# Altium PCB arduino_ext_terminal.PcbDoc (part 2 of 2)
Units mm, origin at the board's own origin, x right, y up, seen from the top; angles counter-clockwise.
Board outline 92.5 x 46.8 mm, 2 copper layers (Top Layer, Bottom Layer), stack 1.036 mm thick; 54 components, 39 nets, 236 pads, 58 vias.
Unrouted connection lines stored in the file: 47.
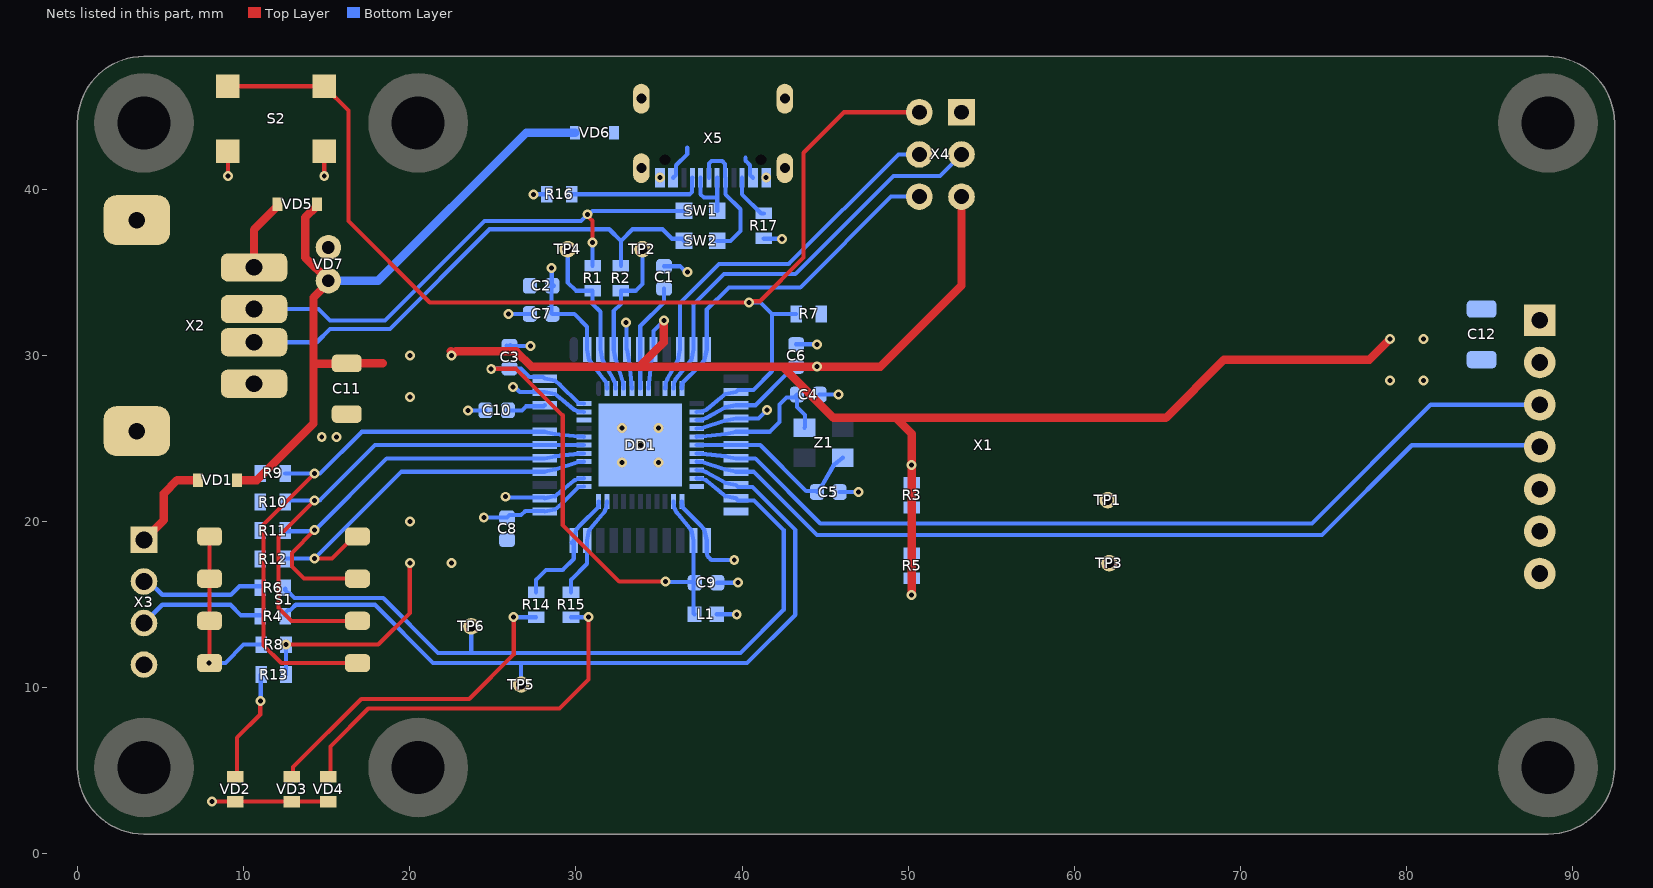
[diagram p2: the nets of this part, all layers, seen from the top]

## Part data
C1: library part CC0603KRX7R9BB105, "Конденсатор кер. 1мкФ 50В", Manufacturer=Yageo, Voltage=50В, Name=CC0603KRX7R9BB105, TKE=X7R
C2: library part CC0603KRX5R8BB475, "Конденсатор кер. 4,7мкФ 25В", Manufacturer=Yageo, Voltage=25В, Name=CC0603KRX5R8BB475, TKE=X7R
C3 C6 C7 C8 C9 C10: library part CC0603JPX7R9BB104, "Конденсатор кер. 0,1мкФ 50В", Manufacturer=Yageo, Voltage=50В, Name=CC0603JPX7R9BB104, TKE=X7R
C4 C5: library part CC0603JRNPO9BN220, "Конденсатор кер. 22пФ 50В", Manufacturer=Yageo, Voltage=50В, Name=CC0603JRNPO9BN220, TKE=NP0
C11 C12: library part GRM3195C1H333J, "Конденсатор кер. 0,033мкФ 50В NP0", Manufacturer=Murata, Voltage=50В, Name=GRM3195C1H333J, TKE=NP0
DD1: library part ATMEGA32U4, "Микроконтроллер AVR 8-bit", HelpURL=https://files.amperka.ru/datasheets/ATMega32u4.pdf, Name=ATmega32u4
L1: "Ферритовая бусина 180Ом 1,5А", Manufacturer=Murata, Name=BLM18PG181SN1D
R1 R2: library part RC0603FR-0722RL, "Резистор 22 Ом 0,1Вт 1%", Manufacturer=YAGEO, Tolerance=1%, Name=RC0603FR-0722RL
R3 R5 R7 R9 R10 R11 R12: library part RC0603FR-0710KL, "Резистор 10кОм 0,063Вт 1%", Manufacturer=YAGEO, Tolerance=1%, Name=RC0603FR-0710KL
R4 R6: library part RC0603FR-07120RL, "Резистор 120Ом 0,063Вт 1%", Manufacturer=YAGEO, Tolerance=1%, Name=RC0603FR-07120RL
R8: library part RC0603FR-071KL, "Резистор 1кОм 0,063Вт 1%", Manufacturer=YAGEO, Tolerance=1%, Name=RC0603FR-071KL
R13 R14 R15: library part RC0603FR-07510RL, "Резистор 510 Ом 0,1Вт 1%", Manufacturer=YAGEO, Tolerance=1%, Name=RC0603FR-07510RL
R16 R17: library part RC0603FR-075K1L, "Резистор 5,1кОм 0,1Вт 1%", Manufacturer=YAGEO, Tolerance=1%, Name=RC0603FR-075K1L
S1: library part A6S-4102-H
S2: "тактовая кнопка SMD", Name=IT-1187
SW1 SW2: library part jumper, "Запаиваемая перемычка"
TP1 TP2 TP3 TP4 TP5 TP6: library part TESTPOINT_HOLE
  TP1: Name=SCL
  TP2: Name=USB_Dp
  TP3: Name=SDA
  TP4: Name=USB_Dn
  TP5: Name=RX
  TP6: Name=TX
VD1 VD5 VD6: "Диод Шоттки 1N5817WS 20V 1А 0.45V", current=1A, drop voltage=0,45В, Voltage=20В, Name=1N5817WS, Производитель="Hottech Co. Ltd"
VD2: library part FYLS-0603BUGC, "Светодтод зеленый SMD Foryard Optoelectronics Co.", Name="Зеленый светодиод"
VD3 VD4: library part FYLS-0603BUBC, "Светодтод синий SMD Foryard Optoelectronics Co.", Name="Синий светодиод"
VD7: "Стабилитрон 5.6В, 5%, 1Вт, 1N4734A", Voltage MAX=5.88, Voltage MIN=5.32, ComponentLink1Description=HelpURL, ComponentLink1URL=https://www.promelec.ru/fs/sources/54/98/aa/7a/f161d9308e45db5c55639eb6.pdf, Name=1N4734A
X1: library part "OLED2,42 - header", "OLED дисплей 2.42inc - PLS2.54 - 1x7", Contact_1=VSS, Contact_2=VCC, Contact_3=SCLK, Contact_4=SDA, Contact_5=RES, Contact_6=DC, Contact_7=CS, Наименование=OLED2.42
X2: library part HEADER-USB-2.0, Contact_1=+5В, Contact_2=D-, Contact_3=D+, Contact_4=GND
X3: library part CWF-4, "Разъем - 4 конт. прямая вилка на плату", Contact_1=+5В, Contact_2=RX, Contact_3=TX, Contact_4=GND, Name="DS1069-4M (CWF-4)"
X4: library part "PLS-3x2 ICSP", "Разъем - 6 конт. 2x3, шаг 2,54 мм", Contact_1=MISO, Contact_2=+5В, Contact_3=SCK, Contact_4=MOSI, Contact_5=RESET, Contact_6=GND, Name="PLS 3 x 2"
X5: library part USB4105-15-A-120, "USB Type-C USB4105-GF-A / GCT", Contact_1=SBU2, Contact_2=CC1, Contact_3=Dn2, Contact_4=Dp1, Contact_5=Dn1, Contact_6=Dp2, Contact_7=SBU1, Contact_8=CC2, Contact_9=VCC, Contact_10=GND, Name="USB Type-C"
Z1: library part KX-7-16.0MHz, "Кварцевый резонатор 16МГц", Partnumber=12.88605, Name=KX-7-12.0MHz

## Free pads (board coordinates)
  round 6 hole 3.2: ""(4,44) ""(4,5.2)

## Via types
v1: diameter 0.6, hole 0.3, Top Layer to Bottom Layer, tented both sides, 58 vias

## Nets (pads, with @x,y where several pads share a name; then routed paths per layer and width w, separated by ;. In a path a pad name is that pad's centre, name@x,y a point inside that pad or via, vN(x,y) a via of type N, cw(c..) or ccw(c..) an arc to the next point about the centre after c; other vN are vias at no path point)
+5В: C2.2 C6.2 C7.2 C8.2 C11.2 C12.1 DD1.2 DD1.7 DD1.14 DD1.34 L1.2 R3.2 R5.2 R7.2 R8.2 R13.2 VD1.1 VD5.1 VD6.1 VD7.2 X1.2 X4.2 | length 181.4
  Top Layer w0.25: v1(12.55,12.6) 18.1,12.6 20,14.5 v1(20,17.5)
  Top Layer w0.5: VD1.1@9.6,22.5 10.8,22.5 14.2,25.9 14.2,29.5 ; VD5.1@14.4,39.1 14.4,39 13.7,38.3 13.7,35.9 VD7.2@15.1,34.5 15.1,34.389 14.2,33.489 14.2,29.5 ; C11.2@16.2,29.5 14.2,29.5 ; C11.2@16.2,29.525 18.375,29.525 ; v1@22.464,30.25 v1@22.5,30.25 ; v1@22.5,30.046 22.527,30.019 22.546,30.019 22.777,30.25 26.4,30.25 27.325,29.325 33.825,29.325 ; v1(35.3,32.1) 35.281,32.081 35.281,30.781 33.825,29.325 ; v1(50.2,15.6) v1(50.2,23.4) 50.2,25.3 49.25,26.25 ; X4.2@53.2,39.56 53.2,34.2 48.325,29.325 v1(44.5,29.325) 42.425,29.325 ; v1(79,31) 77.75,29.75 69,29.75 65.5,26.25 49.25,26.25 ; 33.825,29.325 42.425,29.325 ; 42.425,29.325 45.5,26.25 49.25,26.25
  Bottom Layer w0.25: R13.2@12.55,10.8 v1(12.55,12.6) ; v1(24.45,20.25) C8.2@25.85,20.25 26,20.4 26.7,20.4 26.95,20.65 28.078,20.65 DD1.34@28.119,20.609 28.744,20.734 29.027,20.965 ccw(c28.869,21.159) 29.046,20.982 30.144,22.084 DD1.34@30.469,22.109 ; C2.2@28.525,34.35 28.525,32.55 C7.2@28.575,32.5 29.9,32.5 30.669,31.731 DD1.2@30.669,30.359 30.794,29.734 31.688,28.55 cw(c31.369,28.309) 31.694,28.542 31.844,28.334 DD1.2@31.869,28.009 ; v1(28.537,35.262) 28.537,34.338 28.675,34.2 C2.2@28.625,34.15 ; DD1.7@34.369,28.009 34.394,28.334 34.544,29.734 DD1.7@34.669,30.359 34.669,31.469 v1(35.3,32.1) ; DD1.14@37.269,26.109 37.594,26.134 37.817,26.229 ccw(c37.719,26.459) 37.841,26.24 38.994,26.884 DD1.14@39.619,27.009 40.809,27.009 42.825,29.025 42.853,29.025 C6.2@43.153,29.325 ; L1.2@38.475,14.425 v1(39.675,14.425) ; v1(50.2,15.6) R5.2@50.2,16.6 ; R3.2@50.2,22.35 v1(50.2,23.4)
  Bottom Layer w0.3: C6.2@43.25,29.325 v1(44.5,29.325)
  Bottom Layer w0.5: VD7.2@15.1,34.5 18.1,34.5 27,43.4 VD6.1@29.95,43.4 ; C6.2@43.153,29.325 C6.2@43.25,29.325
  other v1: 22.5,17.5 20,20 20,27.5 79,28.5 81,28.5 20,30 22.5,30 81,31
CN_RX_1: R6.1 X3.2 | length 7.5
  Bottom Layer w0.25: X3.2@4,16.4 4.3,16.4 5.1,15.6 9.226,15.6 9.741,16.115 R6.1@11,16.115
CN_TX_1: R4.1 X3.3 | length 7.7
  Bottom Layer w0.25: X3.3@4,13.9 5.1,15 9.2,15 9.835,14.365 R4.1@11,14.365
GND: C1.1 C2.1 C3.1 C4.2 C5.2 C6.1 C7.1 C8.1 C9.1 C10.1 C11.1 C12.2 DD1.5 DD1.15 DD1.23 DD1.35 DD1.43 DD1.TP R9.1 R10.1 R11.1 R12.1 R16.2 R17.2 S2.2 VD2.2 VD3.2 VD4.2 VD7.1 X1.1 X1.6 X1.7 X2.4 X2.TP X3.4 X4.6 X5.10 X5.TP | length 46.2
  Top Layer w0.25: v1(8.1,3.15) VD2.2@9.5,3.15 VD4.2@15.1,3.15 ; v1(9.05,40.8) S2.2@9.05,42.3 ; v1(14.85,40.8) S2.2@14.85,42.3
  Bottom Layer w0.25: v1(23.5,26.7) C10.1@24.55,26.7 ; v1(25.75,21.5) 25.796,21.454 28.073,21.454 DD1.35@28.119,21.409 28.744,21.534 29.027,21.765 ; C3.1@25.834,30.591 C3.1@26.017,30.408 ; v1(25.925,32.5) C7.1@27.225,32.5 ; C3.1@26,30.575 C3.1@26.04,30.615 ; C3.1@26.04,30.575 v1(27.25,30.575) ; v1(26.219,28.109) 26.314,28.109 26.614,27.809 DD1.43@28.119,27.809 28.744,27.684 29.027,27.452 ; v1(27.45,39.7) R16.2@28.25,39.7 ; 29.028,21.766 29.86,22.451 cw(c30.019,22.259) 29.921,22.489 30.144,22.584 DD1.35@30.469,22.609 ; 29.028,27.451 29.86,26.766 ccw(c30.019,26.959) 29.921,26.729 30.144,26.634 DD1.43@30.469,26.609 ; v1(32.998,31.985) 33.034,31.95 33.034,30.394 DD1.5@33.069,30.359 33.194,29.734 33.344,28.334 DD1.5@33.369,28.009 ; C1.1@35.3,35.375 36.255,35.375 36.605,35.025 v1(36.7,35.025) ; DD1.23@36.369,21.209 36.394,20.884 37.496,19.786 cw(c37.319,19.609) 37.513,19.767 37.744,19.484 DD1.23@37.869,18.859 37.869,18.148 ccw(c38.296,18.148) 37.994,17.846 38.141,17.7 v1(39.525,17.7) ; DD1.15@37.269,25.609 37.594,25.634 38.994,26.084 DD1.15@39.619,26.209 40.985,26.209 v1(41.506,26.73) v1@41.364,26.73 ; C9.1@38.5,16.325 v1(39.75,16.325) ; R17.2@41.3,37.05 41.325,37.025 42.375,37.025 v1(42.4,37) ; C6.1@43.25,30.675 v1(44.5,30.675) ; C4.2@44.656,27.649 v1(45.787,27.649) ; C5.2@45.858,21.78 v1(46.989,21.78)
  other v1: 32.769,23.55 34.969,23.55 33.869,24.6 14.7,25.1 15.6,25.1 32.769,25.65 34.969,25.65 35.05,40.7 41.45,40.7
MCU_ALIVE_1: DD1.33 R14.1 | length 7.7
  Bottom Layer w0.25: R14.1@27.6,15.75 27.6,16.5 28.2,17.1 29.2,17.1 29.869,17.769 DD1.33@29.869,18.859 ; DD1.33@29.744,18.734 DD1.33@29.869,18.859 ; DD1.33@31.369,21.209 31.344,20.884 30.243,19.786 ccw(c30.419,19.609) 30.226,19.767 29.994,19.484 DD1.33@29.869,18.859
MCU_BIT0_1: DD1.40 R9.2 S1.1 | length 36.7
  Top Layer w0.25: v1(14.275,22.9) 11.2,19.825 11.2,12.55 12.26,11.49 S1.1@16.85,11.49
  Bottom Layer w0.25: R9.2@12.5,22.9 v1(14.275,22.9) 14.6,22.9 17.109,25.409 DD1.40@28.119,25.409 28.744,25.284 30.144,25.134 DD1.40@30.469,25.109
MCU_BIT1_1: DD1.39 R10.2 S1.3 | length 31.8
  Top Layer w0.25: v1(14.275,21.275) 12.1,19.1 12.1,14.8 12.87,14.03 S1.3@16.85,14.03
  Bottom Layer w0.25: R10.2@12.5,21.275 v1(14.275,21.275) 14.575,21.275 17.909,24.609 DD1.39@28.119,24.609 28.744,24.609 DD1.39@30.469,24.609
MCU_BIT2_1: DD1.38 R11.2 S1.5 | length 26.8
  Top Layer w0.25: v1(14.275,19.49) 12.9,18.115 12.9,17.3 13.63,16.57 S1.5@16.85,16.57
  Bottom Layer w0.25: R11.2@12.5,19.425 14.225,19.425 18.609,23.809 DD1.38@28.119,23.809 28.744,23.934 30.144,24.084 DD1.38@30.469,24.109
MCU_BIT3_1: DD1.37 R12.2 S1.7 | length 23.3
  Top Layer w0.25: v1(14.275,17.775) 15.315,17.775 16.65,19.11 S1.7@16.85,19.11
  Bottom Layer w0.25: R12.2@12.5,17.775 v1(14.275,17.775) 19.509,23.009 DD1.37@28.119,23.009 28.744,23.134 30.144,23.584 DD1.37@30.469,23.609
MCU_IO13_1: DD1.32 R15.1 | length 6.2
  Bottom Layer w0.25: R15.1@29.7,15.75 29.7,16.5 30.669,17.469 DD1.32@30.669,18.859 30.794,19.484 31.026,19.767 ; 31.026,19.767 31.712,20.6 ccw(c31.519,20.759) 31.749,20.661 31.844,20.884 DD1.32@31.869,21.209
MCU_MISO_1: DD1.11 X4.1 | length 20.9
  Bottom Layer w0.25: DD1.11@36.369,28.009 36.394,28.334 37.496,29.431 ccw(c37.319,29.609) 37.513,29.45 37.744,29.734 DD1.11@37.869,30.359 37.869,32.769 39.2,34.1 43.5,34.1 48.96,39.56 X4.1@50.66,39.56
MCU_MOSI_1: DD1.10 X4.4 | length 25.3
  Bottom Layer w0.25: DD1.10@35.869,28.009 35.894,28.334 35.989,28.557 cw(c36.219,28.459) 36.026,28.618 36.712,29.45 ; 36.713,29.45 36.944,29.734 DD1.10@37.069,30.359 37.069,33.069 38.9,34.9 43.2,34.9 49.1,40.8 51.9,40.8 X4.4@53.2,42.1
MCU_OLED_RST_1: DD1.22 X1.5
MCU_RST_1: DD1.13 R7.1 S2.1 X4.5 | length 71.3
  Top Layer w0.25: S2.1@9.05,46.2 S2.1@14.85,46.2 16.3,44.75 16.3,38.1 21.2,33.2 v1(40.4,33.2) 40.467,33.267 41.067,33.267 43.7,35.9 43.7,42.2 46.14,44.64 X4.5@50.66,44.64
  Bottom Layer w0.25: DD1.13@37.269,26.609 37.594,26.634 37.817,26.729 ccw(c37.719,26.959) 37.878,26.766 38.71,27.451 ; 38.711,27.452 38.994,27.684 DD1.13@39.619,27.809 39.744,27.934 40.684,27.934 41.8,29.05 41.8,32.5 ; v1(40.4,33.2) 41.1,33.2 41.8,32.5 ; R7.1@43.25,32.5 41.8,32.5
MCU_RX1_1: DD1.20 R4.2 TP5.1 | length 47.4
  Bottom Layer w0.25: R4.2@12.5,14.365 12.5,14.515 12.677,14.692 12.823,14.692 12.871,14.74 12.875,14.74 13.135,15 17.9,15 21.4,11.5 26.7,11.5 ; TP5.1@26.7,10.2 26.7,11.5 ; DD1.20@37.269,23.109 37.594,23.084 37.817,22.989 cw(c37.719,22.759) 37.841,22.977 38.994,22.334 DD1.20@39.619,22.209 39.744,22.084 40.616,22.084 43.2,19.5 43.2,14.4 40.3,11.5 26.7,11.5
MCU_SCK_1: DD1.9 X4.3 | length 23.5
  Bottom Layer w0.25: DD1.9@35.369,28.009 35.394,28.334 35.489,28.557 cw(c35.719,28.459) 35.501,28.58 36.144,29.734 DD1.9@36.269,30.359 36.269,33.169 38.6,35.5 42.8,35.5 49.4,42.1 X4.3@50.66,42.1
MCU_SCL_1: DD1.18 R3.1 TP1.1 X1.3 | length 56.3
  Bottom Layer w0.25: DD1.18@37.269,24.109 37.594,24.084 38.994,23.934 DD1.18@39.619,23.809 40.791,23.809 44.7,19.9 50.2,19.9 ; R3.1@50.2,20.85 50.2,19.9 ; X1.3@88,27.04 81.44,27.04 74.3,19.9 50.2,19.9
MCU_SDA_1: DD1.19 R5.1 TP3.1 X1.4 | length 55.8
  Bottom Layer w0.25: DD1.19@37.269,23.609 37.594,23.584 38.994,23.134 DD1.19@39.619,23.009 40.691,23.009 44.5,19.2 50.1,19.2 ; R5.1@50.2,18.1 50.2,19.1 50.1,19.2 ; X1.4@88,24.5 87.9,24.6 80.3,24.6 74.9,19.2 50.1,19.2
MCU_TX2_1: DD1.21 R6.2 TP6.1 | length 45.5
  Bottom Layer w0.25: R6.2@12.5,15.965 12.5,15.883 12.725,15.658 12.807,15.658 13.065,15.4 18.4,15.4 21.7,12.1 23.7,12.1 ; TP6.1@23.7,13.7 23.7,12.1 ; DD1.21@37.269,22.609 37.594,22.584 37.817,22.489 cw(c37.719,22.259) 37.878,22.451 38.71,21.766 ; 38.711,21.765 38.994,21.534 DD1.21@39.619,21.409 39.744,21.284 40.716,21.284 42.5,19.5 42.5,14.7 39.9,12.1 23.7,12.1
MCU_USB_Dn_1: DD1.3 R1.2 TP4.1 | length 10
  Bottom Layer w0.25: TP4.1@29.5,36.4 29.5,34.4 30,33.9 R1.2@31,33.9 31,33.1 31.469,32.631 DD1.3@31.469,30.359 31.594,29.734 32.237,28.58 cw(c32.019,28.459) 32.249,28.557 32.344,28.334 DD1.3@32.369,28.009
MCU_USB_Dp_1: DD1.4 R2.2 TP2.1 | length 9.2
  Bottom Layer w0.25: DD1.4@32.869,28.009 32.844,28.334 32.394,29.734 DD1.4@32.269,30.359 32.269,32.669 32.7,33.1 R2.2@32.7,33.9 33.6,33.9 34,34.3 TP2.1@34,35.9
NetC1_2: C1.2 DD1.6 | length 6.6
  Bottom Layer w0.25: DD1.6@33.869,28.009 33.869,28.334 DD1.6@33.869,30.359 33.869,31.769 35.3,33.2 C1.2@35.3,34.025
NetC3_2: C3.2 C9.2 DD1.24 DD1.44 L1.1 | length 35
  Top Layer w0.25: v1(24.9,29.2) 26.4,29.2 29.2,26.4 29.2,19.8 32.6,16.4 v1(35.4,16.4)
  Bottom Layer w0.25: v1(24.9,29.2) 24.913,29.212 26.002,29.212 26.015,29.2 C3.2@26.279,29.2 ; C3.2@26.239,29.24 C3.2@26.279,29.2 ; 26.685,29.2 C3.2@26.279,29.2 ; 26.725,29.175 27.19,28.71 28.018,28.71 DD1.44@28.119,28.609 28.744,28.484 29.027,28.252 cw(c28.869,28.059) 29.046,28.235 30.144,27.134 DD1.44@30.469,27.109 ; v1(35.4,16.4) 35.438,16.362 C9.2@37.069,16.362 ; DD1.24@35.869,21.209 35.894,20.884 35.989,20.661 ; 36.026,20.6 36.712,19.767 ; 36.713,19.767 36.944,19.484 DD1.24@37.069,18.859 C9.2@37.069,16.362 ; L1.1@37.069,14.481 L1.1@37.125,14.425 cw(c37.26,14.56) 37.069,14.56 C9.2@37.069,16.362 ; C9.2@37.15,16.325 37.113,16.362 C9.2@37.069,16.362
NetC4_1: C4.1 DD1.16 Z1.2 | length 9.8
  Bottom Layer w0.25: DD1.16@37.269,25.109 37.594,25.134 38.994,25.284 DD1.16@39.619,25.409 41.659,25.409 42.25,26 42.25,27.05 42.675,27.474 43.131,27.474 C4.1@43.306,27.649 43.306,26.91 43.787,26.429 43.787,25.687 Z1.2@43.75,25.65
NetC5_1: C5.1 DD1.17 Z1.1 | length 11
  Bottom Layer w0.25: DD1.17@37.269,24.609 DD1.17@39.619,24.609 41.091,24.609 43.854,21.846 44.442,21.846 C5.1@44.508,21.78 44.72,22.043 45.525,23.425 Z1.1@46.05,23.85
NetC10_2: C10.2 DD1.42 | length 2.3
  Bottom Layer w0.25: C10.2@25.9,26.7 26.752,26.7 26.994,26.942 28.053,26.942 DD1.42@28.119,27.009
NetR8_1: R8.1 S1.2 S1.4 S1.6 S1.8 | length 11.2
  Top Layer w0.25: v1(7.9,11.5) 7.95,11.55 S1.4@7.95,14.03 S1.6@7.95,16.57 S1.8@7.95,19.11
  Bottom Layer w0.25: v1(7.9,11.5) 8.9,11.5 10,12.6 R8.1@11.05,12.6
NetR13_1: R13.1 VD2.1 | length 6.8
  Top Layer w0.25: VD2.1@9.5,4.65 9.6,4.75 9.6,7 11,8.4 v1(11,9.2)
  Bottom Layer w0.25: v1(11,9.2) 11.025,9.225 11.025,10.775 R13.1@11.05,10.8
NetR14_2: R14.2 VD3.1 | length 20.3
  Top Layer w0.25: VD3.1@12.9,4.65 12.979,4.729 12.979,5.229 17.075,9.325 23.575,9.325 26.25,12 v1(26.25,14.25)
  Bottom Layer w0.25: v1(26.25,14.25) R14.2@27.6,14.25
NetR15_2: R15.2 VD4.1 | length 23.8
  Top Layer w0.25: VD4.1@15.1,4.7 15.229,4.829 15.229,6.479 17.5,8.75 29,8.75 30.75,10.5 v1(30.75,14.25)
  Bottom Layer w0.25: R15.2@29.7,14.25 v1(30.75,14.25)
NetR16_1: R16.1 X5.2 | length 8.1
  Bottom Layer w0.25: R16.1@29.75,39.7 36.829,39.7 36.975,39.846 36.975,40.675 X5.2@37,40.7
NetR17_1: R17.1 X5.8 | length 2.8
  Bottom Layer w0.25: X5.8@40,40.7 40,39.7 41.15,38.55 R17.1@41.3,38.55
NetVD1_2: VD1.2 X3.1 | length 5.7
  Top Layer w0.5: X3.1@4,18.9 5.2,20.1 5.2,21.7 6,22.5 VD1.2@7.25,22.5
NetVD5_2: VD5.2 X2.1 | length 4.4
  Top Layer w0.5: X2.1@10.625,35.3 10.625,37.575 12.05,39 VD5.2@12.05,39.1
NetVD6_2: VD6.2 X5.9 | length 3.5
  Bottom Layer w0.25: X5.9@35.85,40.7 36.025,40.875 36.025,41.45 36.7,42.125 36.7,42.5 ; 40.2,41.9 40.2,41.725 40.475,41.45 40.475,40.875 X5.9@40.65,40.7
USB-C_Dn_1: SW1.1 X5.3 X5.5 | length 4.1
  Bottom Layer w0.25: X5.3@37.5,40.7 37.5,39.7 37.7,39.5 38.5,39.5 ; SW1.1@38.5,38.7 38.5,39.5 ; X5.5@38.5,40.7 38.5,39.5
USB-C_Dp_1: SW2.1 X5.4 X5.6 | length 8
  Bottom Layer w0.25: X5.4@38,40.7 38,41.554 38.146,41.7 38.8,41.7 38.975,41.525 38.975,40.725 X5.6@39,40.7 39,39.7 39.9,38.8 39.9,37.5 39.3,36.9 SW2.1@38.5,36.9
USB_Dn_1: R1.1 SW1.2 X2.2 | length 32.1
  Top Layer w0.25: v1(30.7,38.5) 30.7,38.405 31,38.105 v1(31,36.8)
  Bottom Layer w0.25: X2.2@10.625,32.8 14.5,32.8 15.2,32.1 18.5,32.1 24.5,38.1 30.3,38.1 v1(30.7,38.5) 30.795,38.5 30.995,38.7 SW1.2@36.5,38.7 ; R1.1@31,35.4 v1(31,36.8)
USB_Dp_1: R2.1 SW2.2 X2.3 | length 31.1
  Bottom Layer w0.25: X2.3@10.625,30.8 14.4,30.8 15.2,31.6 18.8,31.6 24.8,37.6 32,37.6 32.7,36.9 ; R2.1@32.7,35.4 32.7,36.9 ; SW2.2@36.5,36.9 36.375,37.025 35.775,37.025 35.2,37.6 33.4,37.6 32.7,36.9
pads on no net: DD1.1 DD1.8 DD1.12 DD1.25 DD1.26 DD1.27 DD1.28 DD1.29 DD1.30 DD1.31 DD1.36 DD1.41 X1.0 X5. X5.1 X5.7 Z1.

## Polygon pours and split planes (outlines as drawn)
+5В on Bottom Layer "+5В_L02_P006" (solid, pour order 6): 88,30.75 88,28.75 88.5,28.25 86.5,28.25 86,27.75 78.25,27.75 78.25,31.5 82.725,31.5 83.55,30.675 83.625,30.75
+5В on Bottom Layer "+5В_L02_P003" (solid, remove dead copper, pour order 3): 19,30.75 19,15.75 22.25,12.5 40,12.5 42.5,15 42.5,34 39.5,37 25.25,37
NetVD6_2 on Bottom Layer "NETVD6_2_L02_P000" (solid, remove dead copper, pour order 0): 31.8,42.6 34.9,42.6 35.5,42 35.5,40.1 36.2,40.1 36.2,41.4 36.7,41.9 39.8,41.9 40.3,41.4 40.3,40.1 41,40.1 41,42.9 39.7,44.2 31.8,44.2
+5В on Top Layer "+5В_L01_P004" (solid, pour order 4): 78,31.5 78,27.75 82.25,27.75 82.25,31.5
+5В on Top Layer "+5В_L01_P002" (solid, pour order 2): 18.25,18 19.75,16.5 23.25,16.5 23.5,16.75 23.5,18.5 21.75,20.25 21.75,28 24,30.25 24,30.5 23,31.5 18.75,31.5 18.25,31
GND on Top Layer "GND_L01_P001" (solid, pour order 1): 15.25,27.4 15.25,26.55 14.2,25.5 14.2,24.3 14.5,24 16.3,24 17.8,25.5 17.8,27.4

## Other copper
Bottom Layer:
  pour cut-out: 31.007,20.903 31.007,21.5 30.411,21.5 29.069,20.159 30.262,20.159
  pour cut-out: 29.069,29.059 30.262,29.059 31.012,28.309 29.819,28.309

## Silkscreen, mask and mechanical layers (free items; w line width, h text height)
Top Overlay:
  text "№" at 37.371,59.63 h2
  text "1.0" at 41.631,57.675 h2
  text "REV." at 37.366,57.433 h2
  text "01.01.70" at 37.372,55.255 h2
Board Shape:
  the board outline again, w0.1
Fab Notes:
  text "1. Плата должна соответствовать 4-классу точности. / 2. Порядок слоёв согласно файлу *.EXTREP. / 3. Необходимо нанести сквозную нумерацию на текстолите. Расположение цифр и высота шрифта указаны на слое «Assembly Notes»(M4). Используемый шрифт – GOST type B. В данном заказе вести нумерацию с 001 по n, где n - количество плат в заказе." at 0,-8.882 h1.5
Assembly Notes:
  text "589" at 41.011,59.888 h2
Top Assembly:
  lines w0.1: 0.1,24.6 91.4,24.6

## Text inside footprints (layer, text, board x,y; h text height)
X1: Top Overlay "1" at 88.9,34.6 h3 r90